# EAGLE board xilinx07 (EAGLE 3.55)
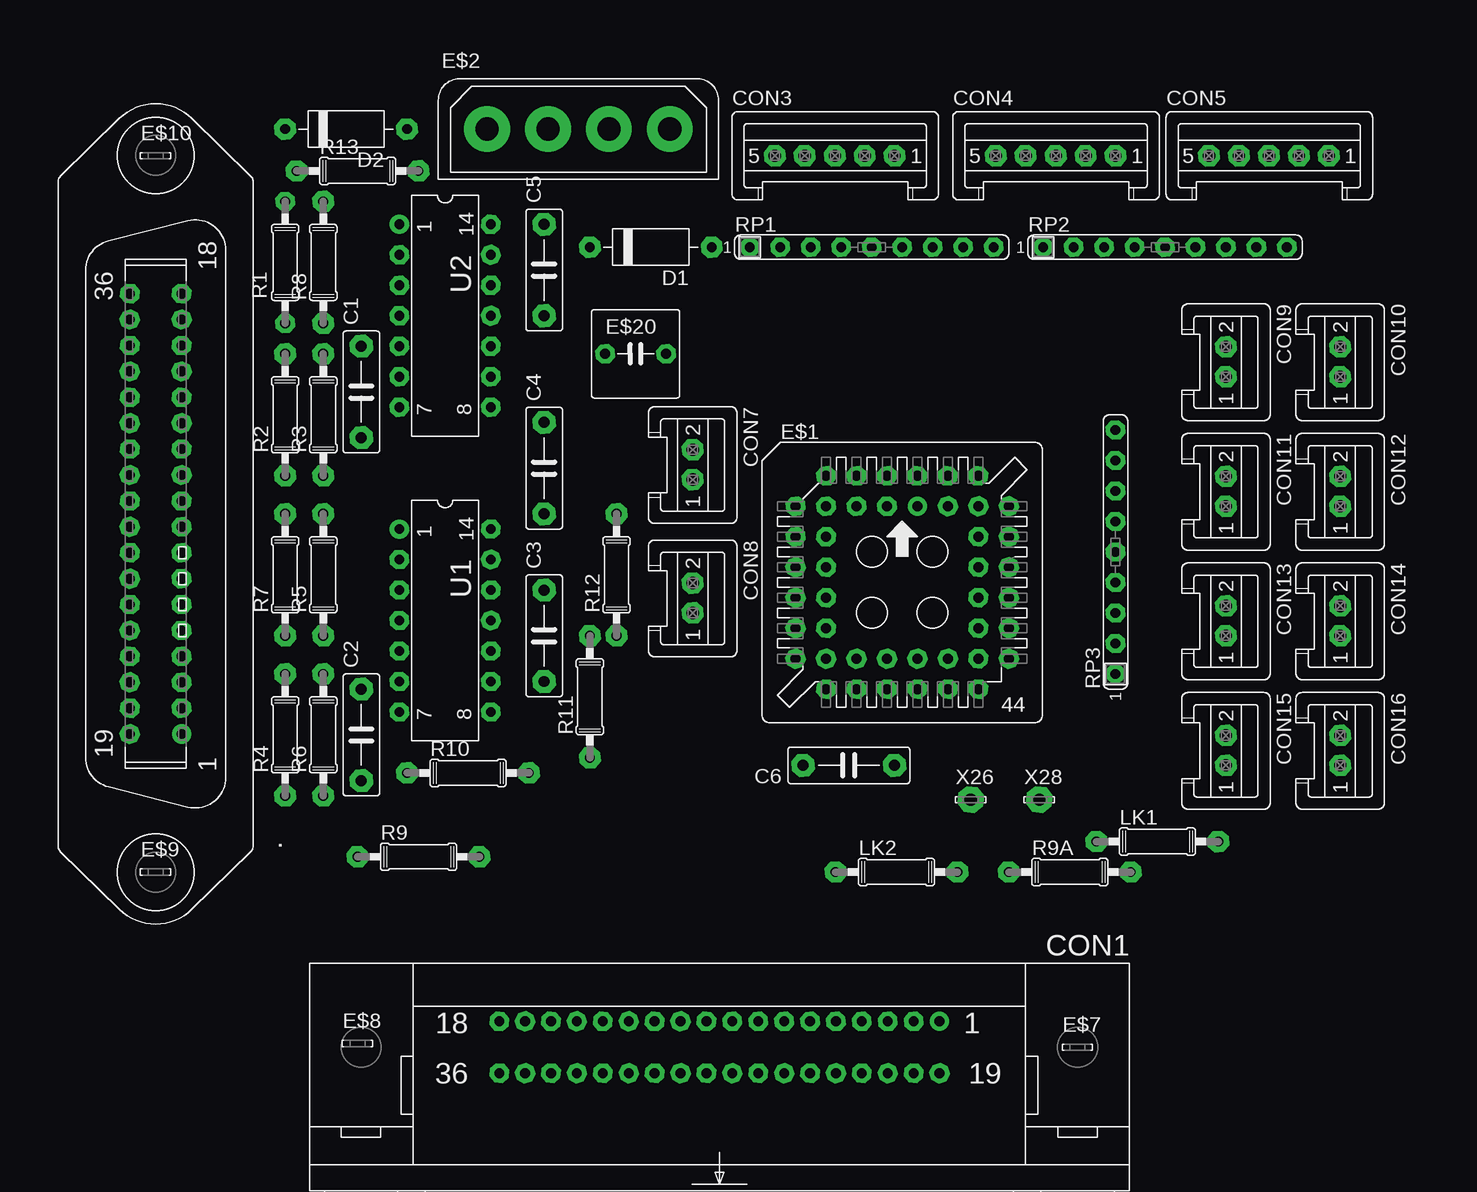
[diagram p0: board, top side]
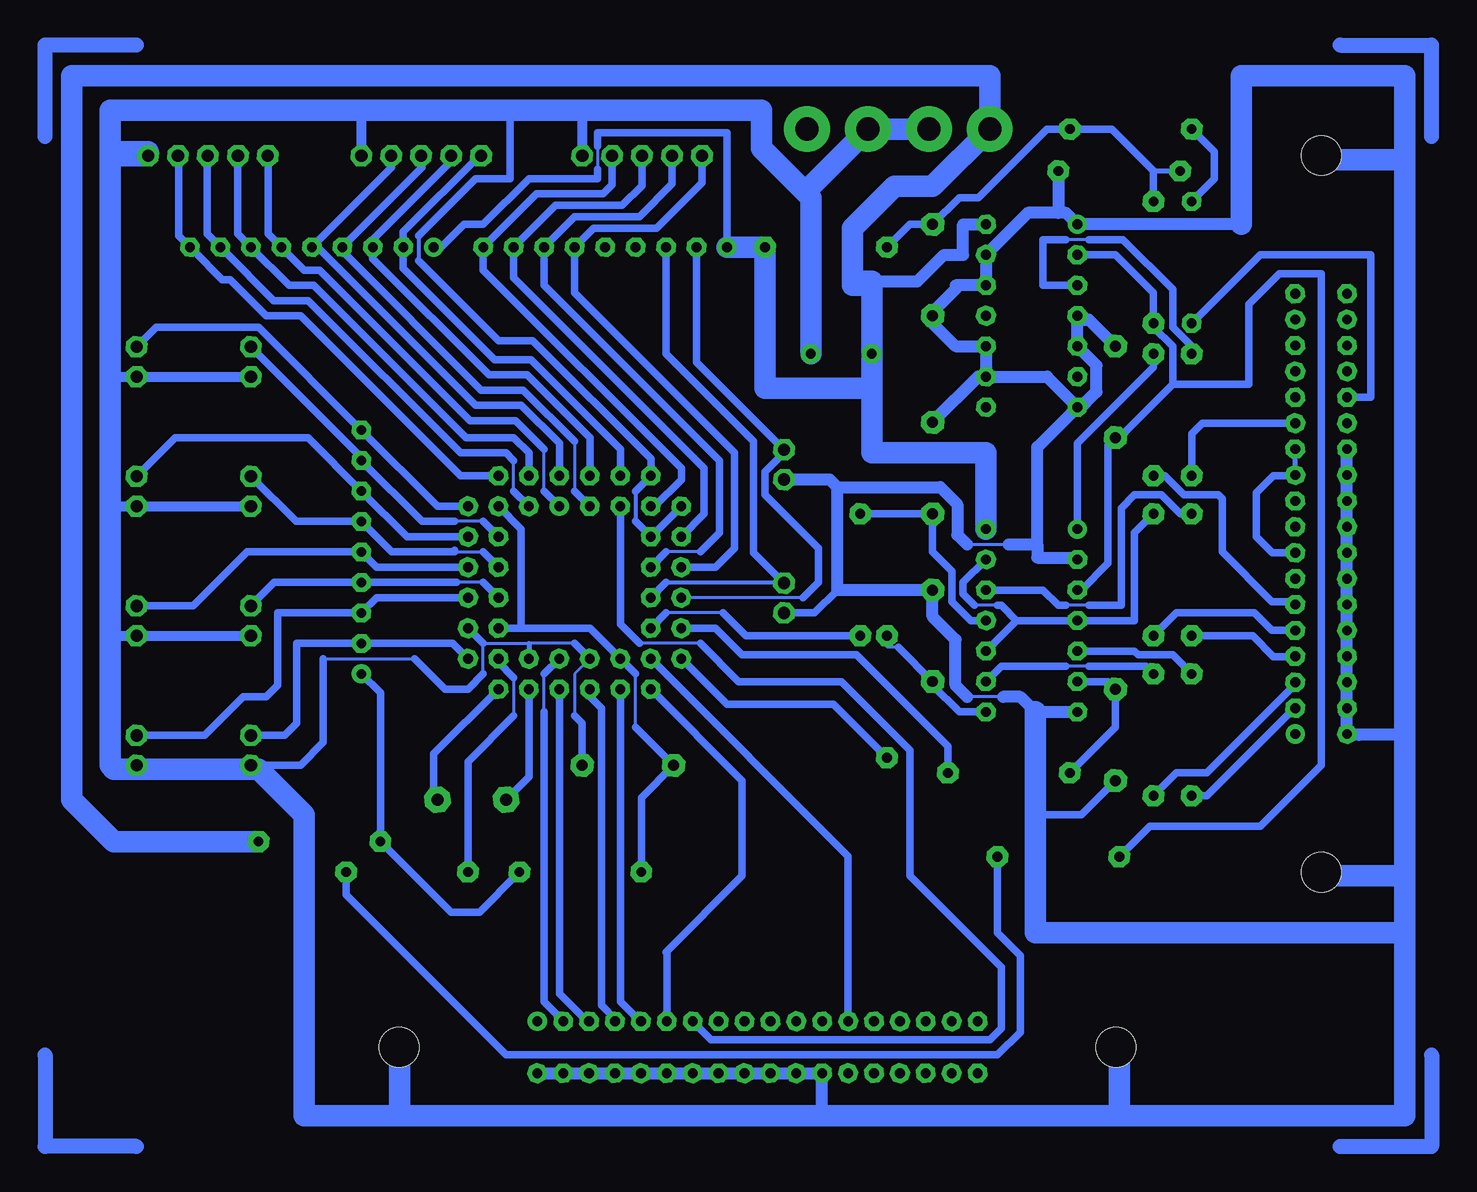
[diagram p1: board, bottom side, seen from below]

No outline drawn. Coordinates in mm, seen from the top.
Copper layers used: Bottom

## Footprints (pad centres in the part's own frame; a part is rotated, then mirrored left to right if it is on the bottom)
V = drill 0.813 pad 1.6 round:  -18.352,-2.159 | drill 0.813 pad 1.6 octagon:  -16.192,-2.159;  -14.034,-2.159;  -11.874,-2.159;  -9.716,-2.159;  -7.556,-2.159;  -5.397,-2.159;  -3.239,-2.159;  -1.079,-2.159;  1.079,-2.159;  3.239,-2.159;  5.397,-2.159;  -18.352,2.159;  -16.192,2.159;  -14.034,2.159;  -11.874,2.159;  -9.716,2.159;  -7.556,2.159;  -5.397,2.159;  -3.239,2.159;  -1.079,2.159;  1.079,2.159;  3.239,2.159;  5.397,2.159;  7.556,-2.159;  9.716,-2.159;  11.874,-2.159;  14.034,-2.159;  16.192,-2.159;  18.352,-2.159;  7.556,2.159;  9.716,2.159;  11.874,2.159;  14.034,2.159;  16.192,2.159;  18.352,2.159 | hole 3.302: -29.87,0; 29.87,0
,5B3 = drill 0.914 pad 1.905 octagon:  -3.81,0;  3.81,0
H = drill 0.813 pad 1.6 round:  -18.352,-2.159 | drill 0.813 pad 1.6 octagon:  -16.192,-2.159;  -14.034,-2.159;  -11.874,-2.159;  -9.716,-2.159;  -7.556,-2.159;  -5.397,-2.159;  -3.239,-2.159;  -1.079,-2.159;  1.079,-2.159;  3.239,-2.159;  5.397,-2.159;  -18.352,2.159;  -16.192,2.159;  -14.034,2.159;  -11.874,2.159;  -9.716,2.159;  -7.556,2.159;  -5.397,2.159;  -3.239,2.159;  -1.079,2.159;  1.079,2.159;  3.239,2.159;  5.397,2.159;  7.556,-2.159;  9.716,-2.159;  11.874,-2.159;  14.034,-2.159;  16.192,-2.159;  18.352,-2.159;  7.556,2.159;  9.716,2.159;  11.874,2.159;  14.034,2.159;  16.192,2.159;  18.352,2.159 | hole 3.302: -29.87,0; 29.87,0
5P = drill 1.016 pad 1.778 octagon:  -4.978,0;  -9.982,0;  -7.493,0;  -2.489,0;  0,0
2P = drill 1.016 pad 1.778 octagon:  -2.489,0;  0,0
10 = drill 0.813 pad 1.778 octagon:  -5.08,0;  5.08,0
4 = drill 0.813 pad 1.6 round:  1.27,6.35 | drill 0.813 pad 1.6 octagon:  -1.27,8.89;  -1.27,6.35;  -3.81,8.89;  -3.81,6.35;  -6.35,8.89;  -8.89,6.35;  -6.35,6.35;  -8.89,3.81;  -6.35,3.81;  -8.89,1.27;  -6.35,1.27;  -8.89,-1.27;  -6.35,-1.27;  -8.89,-3.81;  -6.35,-3.81;  -8.89,-6.35;  -6.35,-8.89;  -6.35,-6.35;  -3.81,-8.89;  -3.81,-6.35;  -1.27,-8.89;  -1.27,-6.35;  1.27,-8.89;  1.27,-6.35;  3.81,-8.89;  3.81,-6.35;  6.35,-8.89;  8.89,-6.35;  6.35,-6.35;  8.89,-3.81;  6.35,-3.81;  8.89,-1.27;  6.35,-1.27;  8.89,1.27;  6.35,1.27;  8.89,3.81;  6.35,3.81;  8.89,6.35;  6.35,8.89;  6.35,6.35;  3.81,8.89;  3.81,6.35;  1.27,8.89
OPPY-4 = drill 1.93 pad 3.81 round:  7.62,0;  2.54,0;  -2.54,0;  -7.62,0
P10 = drill 1.016 pad 2.159 octagon:  0,0
B7,2 = drill 0.813 pad 1.6 octagon:  -2.54,0;  2.54,0
07/10A = drill 0.813 pad 1.778 octagon:  -5.08,0;  5.08,0
07/10 = drill 0.813 pad 1.6 octagon:  -5.08,0;  5.08,0
L9 = drill 0.813 pad 1.6 round:  -10.16,0 | drill 0.813 pad 1.6 octagon:  -7.62,0;  -5.08,0;  -2.54,0;  0,0;  2.54,0;  5.08,0;  7.62,0;  10.16,0
L14 = drill 0.813 pad 1.6 round:  -7.62,-3.81 | drill 0.813 pad 1.6 octagon:  -5.08,-3.81;  -2.54,-3.81;  0,-3.81;  2.54,-3.81;  5.08,-3.81;  7.62,-3.81;  7.62,3.81;  5.08,3.81;  2.54,3.81;  0,3.81;  -2.54,3.81;  -5.08,3.81;  -7.62,3.81

## Placement (x,y rotation side)
.  [V]  2.54,48.9 90 top
C1  100pF  [,5B3]  19.68,59.05 90 top
C2  100pF  [,5B3]  19.68,30.48 90 top
C3  100pF  [,5B3]  34.92,38.73 90 top
C4  100pF  [,5B3]  34.92,52.7 90 top
C5  0.01uF  [,5B3]  34.92,69.22 90 top
C6  100pF  [,5B3]  60.33,27.94 180 top
CON1  Printer Port  [H]  49.53,4.45 180 top
CON3  X Stepper  [5P]  64.14,78.74 0 top
CON4  Y Stepper  [5P]  82.55,78.74 0 top
CON5  Z Stepper  [5P]  100.33,78.74 0 top
CON7  Spindle  [2P]  47.31,51.75 270 top
CON8  Coolant  [2P]  47.31,40.64 270 top
CON9  XS Limit  [2P]  91.76,60.33 270 top
CON10  XE  [2P]  101.28,60.33 270 top
CON11  YS Limit  [2P]  91.76,49.53 270 top
CON12  YE  [2P]  101.28,49.53 270 top
CON13  ZS Limit  [2P]  91.76,38.73 270 top
CON14  ZE  [2P]  101.28,38.73 270 top
CON15  Stop  [2P]  91.76,27.94 270 top
CON16  Door  [2P]  101.28,27.94 270 top
D1  1N4001  [10]  43.81,71.12 180 top
D2  1N4001  [10]  18.41,80.96 180 top
E$1  xilinx9536PC44  [4]  64.77,43.18 0 top
E$2  [OPPY-4]  37.78,80.96 0 top
E$3  [1]  -6.03,-3.17 0 top
E$4  [1]  108.27,-3.17 90 top
E$5  [1]  108.27,87.31 180 top
E$6  [1]  -6.03,87.31 270 top
E$7  [P10]  79.38,4.45 0 top
E$8  [P10]  19.37,4.76 0 top
E$9  [P10]  2.54,19.05 0 top
E$10  [P10]  2.54,78.74 0 top
E$20  22uF 16V  [B7,2]  42.55,62.23 0 top
LK1  0R  [07/10A]  86.04,21.59 0 top
LK2  0R  [07/10A]  64.29,19.05 0 top
R1  100R  [07/10]  13.34,69.85 90 top
R2  50R  [07/10A]  13.34,57.15 90 top
R3  300R  [07/10A]  16.51,57.15 90 top
R4  300R  [07/10A]  13.34,30.48 90 top
R5  300R  [07/10A]  16.51,43.81 90 top
R6  300R  [07/10A]  16.51,30.48 90 top
R7  300R  [07/10A]  13.34,43.81 90 top
R8  5K1  [07/10A]  16.51,69.85 90 top
R9  47R  [07/10A]  24.45,20.32 0 top
R9A  47R  [07/10A]  78.74,19.05 0 top
R10  100R  [07/10A]  28.57,27.3 0 top
R11  100R  [07/10A]  38.73,33.66 90 top
R12  100R  [07/10A]  40.96,43.81 90 top
R13  1K0  [07/10A]  19.37,77.47 0 top
RP1  1K  [L9]  62.23,71.12 0 top
RP2  1K  [L9]  86.68,71.12 0 top
RP3  1K  [L9]  82.55,45.72 90 top
U1  74HC125  [L14]  26.67,40.01 270 top
U2  74HC125  [L14]  26.67,65.41 270 top
X26  [P10]  70.48,25.08 0 top
X28  [P10]  76.2,25.08 0 top

## Library data of the parts
. CON1 = champ-c
C1-C6 E$20 = cap
CON3-CON5 CON7-CON16 = con-mt
D1 D2 = discrete
E$1 = plccpack
E$2 = amp-nlok
E$3-E$6 = marks
E$7-E$10 X26 X28 = solpad
LK1 LK2 R1-R9 R9A R10-R13 = r
RP1-RP3 = r-sil
U1 U2 = 74xx

## Nets
CON2: .. C1. C3. C4. C5. C6. CON1. CON3. CON4. CON5. CON7. CON8. CON9. CON10. CON11. CON12. CON13. CON14. CON15. CON16. E$1. E$2. E$20. R13. U1. U2.
S$1: CON1. E$1.
S$2: E$1. R10.
S$3: CON1. E$1.
S$4: CON1. E$1.
S$5: CON1. E$1.
S$6: CON1. E$1.
S$7: CON1. E$1.
S$8: E$1. R9A.
S$9: CON9. E$1. RP3.
S$10: CON3. E$1. RP1.
S$11: CON3. E$1. RP1.
S$12: CON3. E$1. RP1.
S$13: CON3. E$1. RP1.
S$14: CON4. E$1. RP2.
S$15: R7.
S$16: R5.
S$17: .. R4.
S$18: .. R6.
S$19: .. R2.
S$20: .. R1.
S$21: C2. R10. U1.
S$22: .. R3.
S$23: R7. U1.
S$24: R6. U1.
S$25: R5. U1.
S$26: R4. U1.
S$27: R2. U2.
S$28: R3. U1.
S$29: D2. R1.
S$30: C5. D1. D2. R8. R13.
S$31: C1. R8. R9. U1. U2.
S$32: C3. R11. U1.
S$33: C4. R12. U1.
S$34: D1. E$2. E$20. LK1. RP1. RP2. U1. U2.
S$35: R9. R9A.
S$36: E$1. R11.
S$37: E$1. R12.
S$38: CON4. E$1. RP2.
S$39: CON4. E$1. RP2.
S$40: CON4. E$1. RP2.
S$41: E$1.
S$42: CON5. E$1. RP2.
S$43: E$1. RP2.
S$44: CON5. E$1. RP2.
S$45: CON1. E$1.
S$46: CON8. E$1. RP1.
S$47: CON7. E$1. RP1.
S$48: CON10. E$1. RP3.
S$49: CON12. E$1. RP3.
S$50: ..
S$51: CON14. E$1. RP3.
S$52: CON13. E$1. RP3.
S$53: CON16. E$1. RP3.
S$54: CON15. E$1. RP3.
S$55: LK1. LK2. RP3.
S$56: C2.
S$60: E$1. X28.
S$61: E$1. X26.
S$62: C6. E$1. LK2.
S$63: CON11. E$1. RP3.
S$64: CON5. RP2.
S$65: ..
S$66: ..

## Tracks (layer width: path | path; a pad name or v marks a point on that pad's centre or on a via)
CON2
  Bottom 0.254: 64.77,32.07 64.77,35.56 63.5,36.83 | 22.86,57.78 22.86,57.47 | 30.48,60.33 31.11,60.33 | 72.39,35.56 72.39,38.1 68.58,38.1 64.77,38.1 | 32.07,46.35 28.57,46.35 | 35.24,65.09 35.24,65.41 34.92,65.41 32.7,67.63 30.8,67.63 30.48,67.94 | 85.72,36.83 78.11,36.83 | 33.02,67.94 33.02,67.63 | 29.05,33.66 32.07,33.66 | 26.35,13.97 26.67,13.65
  Bottom 0.317: 59.69,50.8 59.69,48.26 | 77.79,72.07 77.79,70.01
  Bottom 0.406: 68.58,38.1 68.58,36.83
  Bottom 0.61: 55.88,49.53 58.42,46.99 59.69,48.26 | 59.69,50.8 58.42,52.07 58.42,53.5 68.26,63.34 | 64.14,27.62 64.14,27.94 64.14,31.43 64.77,32.07 | 68.26,63.34 | 68.26,63.34 71.12,63.34 77.79,70.01 | 22.86,57.78 26.19,54.45 | 22.54,45.24 22.7,45.24 22.86,45.09 | 77.79,72.07 73.03,76.83 70.17,76.83 70.17,82.55 | 64.77,38.1 63.5,36.83 | 72.39,38.1 73.66,39.37 | 72.39,35.56 73.66,34.29 75.56,34.29 78.11,36.83 | CON8. 44.77,40.64 42.86,42.55 | 85.72,36.83 85.72,29.84 87.63,27.94 92.08,27.94 | R13. 24.45,74.61 22.86,73.03 | 52.77,2.29 52.7,2.29 52.7,2.22 | 50.61,2.29 50.64,2.29 50.64,2.22
  Bottom 0.813: 64.14,82.55 CON3. | 82.55,82.55 CON4. | CON9. CON10. 103.5,60.33 | CON11. CON12. 103.5,49.53 | CON15. 92.08,27.94 CON16. 103.5,27.94 | CON13. CON14. 103.5,38.73 | 50.48,2.22 50.8,2.22 | 50.48,2.22 | 50.48,2.22 50.61,2.22 50.61,2.29 | 48.42,2.22 48.45,2.22 48.45,2.29 | 46.29,2.22 46.29,2.29 | -0.64,30.48 0.38,30.48 | 44.13,2.22 44.13,2.29 | 44.13,-1.27 44.13,-0.64 | 67.88,2.22 67.88,2.29 | 65.72,2.22 65.72,2.29 | 63.56,2.22 63.56,2.29 | 61.4,2.22 61.4,2.29 | 59.24,2.22 59.24,2.29 | 57.09,2.29 57.09,2.22 57.15,2.22 | 54.93,2.29 54.93,2.22
  Bottom 1.016: C1. 21.91,65.09 22.86,65.09 | 22.86,65.09 22.86,65.41 | 22.86,65.09 22.86,62.87 21.27,61.28 21.27,59.05 22.86,57.47 | E$20. 45.09,76.2 | 0.38,54.29 0.38,52.13 0.38,52.07 | 22.7,45.24 26.19,45.24 26.19,46.35 | 26.19,54.45 22.86,57.78 25.4,60.33 30.48,60.33 30.48,62.87 33.02,62.87 35.24,65.09 | 26.19,54.45 | 0.38,52.07 0.64,52.07 | 0.64,50.16 0.38,50.16 0.38,49.97 | 31.11,60.33 C4. | 0.38,49.97 0.38,52.07 | 26.19,46.35 26.19,54.45 | 28.57,46.35 26.19,46.35 | 0.38,49.97 0.38,47.82 0.38,47.62 | 0.38,47.62 0.64,47.62 | 0.64,45.72 0.38,45.72 0.38,45.66 | 32.07,46.35 32.86,47.15 32.86,49.69 34.29,51.12 42.86,51.12 | 0.38,45.66 0.38,47.62 | 0.38,45.66 0.38,43.5 0.38,43.18 | CON7. 43.5,51.75 42.86,51.12 | 0.38,43.18 0.64,43.18 | 33.02,67.63 35.24,65.41 | 0.38,43.18 0.38,41.34 0.38,41.27 | 42.86,51.12 42.86,42.55 C3. 34.92,40.32 33.02,38.42 33.02,34.61 32.07,33.66 | 0.38,41.27 0.64,41.27 | 0.64,39.37 0.38,39.37 0.38,39.18 | 33.02,67.94 30.48,67.94 30.48,70.48 26.99,73.98 24.45,73.98 | 0.38,39.18 0.38,41.27 | 0.38,39.18 0.38,37.02 0.38,36.83 | R13. 24.45,73.98 | 0.38,36.83 0.64,36.83 | 0.64,34.92 0.38,34.92 0.38,34.86 | 0.38,34.86 0.38,36.83 | 24.45,73.98 23.81,73.98 22.86,73.03 9.21,73.03 | 0.38,34.86 0.38,32.7 0.38,32.38 | 0.38,32.38 0.64,32.38 | 50.61,2.22 48.45,2.22 46.29,2.22 44.13,2.22 44.13,-0.64 | 0.38,32.38 0.38,30.54 0.38,30.48 | 29.05,33.66 27.62,33.66 26.35,32.38 22.86,32.38 | 0.38,30.48 0.64,30.48 | -0.64,30.48 -4.45,30.48 0.38,30.48 | 67.88,2.22 65.72,2.22 63.56,2.22 61.4,2.22 59.24,2.22 57.09,2.22 54.93,2.22 | 54.93,2.29 52.77,2.29 50.64,2.29
  Bottom 1.778: 35.24,80.96 40.32,80.96 45.09,76.2 | E$20. 45.09,75.25 49.21,79.38 49.21,82.55 64.14,82.55 70.17,82.55 82.55,82.55 103.5,82.55 103.5,79.06 100.33,79.06 CON5. 103.5,78.74 103.5,60.33 103.5,49.53 103.5,38.73 103.5,27.94 103.19,27.62 91.12,27.62 87.31,23.81 87.31,-1.27 79.38,-1.27 | 9.21,73.03 9.21,85.41 -4.45,85.41 -4.45,30.48 -4.45,13.97 | 79.38,-1.27 79.38,4.45 | 26.35,32.38 26.35,13.97 -4.45,13.97 | 79.38,-1.27 44.13,-1.27 -4.45,-1.27 -4.45,13.97
S$1
  Bottom 0.61: 41.97,6.6 41.97,20.38 58.42,36.83
S$2
  Bottom 0.61: R10. 33.66,29.53 41.27,37.15 50.8,37.15 53.02,39.37 55.88,39.37
S$3
  Bottom 0.254: 57.09,12.32 57.15,12.38
  Bottom 0.61: 57.09,6.6 57.09,12.32 | 57.15,12.38 50.8,18.73 50.8,26.67 58.42,34.29
S$4
  Bottom 0.254: 59.24,6.6 59.31,6.6
  Bottom 0.61: 59.31,6.6 60.96,8.26 60.96,34.29
S$5
  Bottom 0.254: 61.4,6.6 61.4,6.79
  Bottom 0.61: 61.4,6.79 62.55,7.94 62.55,32.7 63.5,33.66 63.5,34.29
S$6
  Bottom 0.254: 63.56,6.6 63.75,6.6
  Bottom 0.61: 63.75,6.6 66.04,8.89 66.04,34.29
S$7
  Bottom 0.254: 65.72,6.6 65.72,6.67 | 67.31,32.38 67.31,35.56
  Bottom 0.61: 65.72,6.67 67.31,8.26 67.31,32.38 | 67.31,35.56 66.04,36.83
S$8
  Bottom 0.254: 71.12,36.83 71.12,36.51 | 69.85,35.24 69.85,32.07
  Bottom 0.61: 71.12,36.51 69.85,35.24 | 69.85,32.07 73.66,28.26 73.66,19.05
S$9
  Bottom 0.254: 72.39,48.26 74.77,48.26
  Bottom 0.61: 82.55,53.29 82.55,53.34 | 82.55,53.34 82.55,53.61 91.76,62.81 | 82.55,53.34 77.47,48.26 74.77,48.26 | 72.39,48.26 | 71.12,46.99 72.39,48.26
S$10
  Bottom 0.254: 56.2,44.45 55.88,44.45
  Bottom 0.61: 54.15,78.74 54.15,76.5 57.94,72.71 63.18,72.71 64.77,71.12 64.77,67.31 51.44,53.98 51.44,46.04 53.02,44.45 55.88,44.45
S$11
  Bottom 0.254: 54.29,45.72 57.15,45.72
  Bottom 0.61: 56.64,78.74 56.64,76.39 59.37,73.66 64.77,73.66 67.31,71.12 67.31,67.94 52.7,53.34 52.7,47.31 54.29,45.72 | 57.15,45.72 58.42,44.45
S$12
  Bottom 0.61: 59.16,78.74 59.16,76.26 60.8,74.61 66.36,74.61 69.85,71.12 69.85,68.58 53.98,52.7 53.98,48.9 55.88,46.99
S$13
  Bottom 0.254: 58.1,49.53 58.42,49.53
  Bottom 0.61: 61.65,78.74 61.65,76.31 62.39,75.56 67.94,75.56 RP1. 72.39,69.22 55.88,52.7 55.88,51.75 58.1,49.53
S$14
  Bottom 0.254: 72.71,78.74 72.57,78.74
  Bottom 0.61: 72.71,78.74 79.06,72.39 79.06,71.12 79.06,69.37 71.44,61.75 68.42,61.75 60.96,54.29 60.96,52.07
S$15
  Bottom 0.61: 13.34,38.73 8.26,38.73 6.51,36.99 4.45,36.99 | 4.45,36.99
S$16
  Bottom 0.61: 16.51,38.73 14.61,40.64 8.1,40.64 6.67,39.21 5.08,39.21
S$17
  Bottom 0.254: 4.45,33.02 4.7,32.77 4.7,32.7
  Bottom 0.61: 13.34,25.4 12.06,25.4 4.7,32.77
S$18
  Bottom 0.254: 4.45,34.92 4.51,34.86 4.7,34.86
  Bottom 0.61: 16.51,25.4 14.61,27.3 12.06,27.3 4.51,34.86
S$19
  Bottom 0.61: 4.7,56.45 12.45,56.45 13.34,55.56 13.34,52.07
S$20
  Bottom 0.61: 0.38,58.61 -1.59,58.61 -1.59,70.48 7.62,70.48 13.34,64.77
S$21
  Bottom 0.254: 23.81,26.99 23.5,27.3 23.18,27.62
  Bottom 0.61: 22.86,34.92 20.32,34.92 C2. 19.68,31.11 23.18,27.62
S$22
  Bottom 0.254: 4.45,41.27 4.51,41.34 4.7,41.34
  Bottom 0.61: 16.51,52.07 15.56,52.07 13.97,50.48 11.11,50.48 10.79,50.16 10.79,45.72 6.67,41.59 4.76,41.59 4.51,41.34
S$23
  Bottom 0.254: 21.91,41.27 23.81,41.27
  Bottom 0.61: R7. 14.29,48.9 15.88,50.48 18.1,50.48 19.21,49.37 19.21,41.27 21.91,41.27 | 23.81,41.27 24.45,41.27 25.72,42.55 30.48,42.55
S$24
  Bottom 0.254: 21.91,36.2 23.81,36.2 | 30.48,34.92 30.48,34.61
  Bottom 0.61: R6. 17.14,36.2 21.91,36.2 | 23.81,36.2 29.21,36.2 30.48,34.92
S$25
  Bottom 0.254: 23.18,39.69 22.86,40.01 | 29.53,41.27 31.43,41.27 | 30.48,45.09 30.16,45.09
  Bottom 0.61: R5. 18.1,47.31 18.1,40.01 22.86,40.01 27.94,40.01 | 30.48,37.47 27.94,40.01 | 27.94,40.01 29.21,41.27 29.53,41.27 | 31.43,41.27 32.38,42.23 32.38,43.18 30.48,45.09
S$26
  Bottom 0.61: R4. 14.92,37.15 17.78,37.15 18.1,37.47 22.86,37.47
S$27
  Bottom 0.254: 21.91,71.75 23.81,71.75 | 22.86,67.94 22.54,67.94
  Bottom 0.61: R2. 13.34,62.87 14.92,64.45 14.92,67.63 19.05,71.75 21.91,71.75 | 23.81,71.75 25.72,71.75 25.72,67.94 22.86,67.94
S$28
  Bottom 0.406: R3. 16.67,62.23 16.51,62.07
  Bottom 0.61: 22.86,47.62 22.86,54.77 16.51,61.12 16.51,62.07
S$29
  Bottom 0.61: R1. 11.43,76.83 11.43,79.06 D2.
S$30
  Bottom 0.406: 16.51,77.47 14.29,77.47 | 35.24,72.71 C5.
  Bottom 0.61: R8. 16.51,77.47 20,80.96 23.5,80.96 25.4,80.96 31.11,75.25 32.7,75.25 C5. 36.83,73.03 D1.
S$31
  Bottom 0.254: 22.86,70.48 23.18,70.48
  Bottom 0.406: 19.37,55.24 19.68,55.24 20,55.24 | 16.51,64.45 16.51,64.77
  Bottom 0.61: 22.86,42.55 22.54,42.55 20.32,44.77 20.32,54.61 19.68,55.24 | 22.86,70.48 19.68,70.48 16.51,67.31 16.51,64.77 | 14.92,59.69 19.37,55.24 | 19.37,20.32 16.83,22.86 7.62,22.86 2.54,27.94 2.54,68.9 6.03,68.9 8.57,66.36 8.57,59.69 14.92,59.69 | 14.92,59.69 14.92,62.87 16.51,64.45
S$32
  Bottom 0.254: 34.92,34.61 34.92,34.92 | R11. 38.73,37.78 37.78,37.78
  Bottom 0.61: 30.48,32.38 32.7,32.38 34.92,34.61 | 34.92,34.92 37.78,37.78
S$33
  Bottom 0.254: 34.92,48.58 34.92,48.9
  Bottom 0.61: 30.48,40.01 31.75,40.01 33.34,41.59 33.34,44.13 34.92,45.72 34.92,48.9 R12.
S$34
  Bottom 0.254: 62.87,79.69 62.87,77.63 | 62.87,80.64
  Bottom 0.61: 76.52,71.12 75.88,71.12 73.98,73.03 72.39,73.03 68.58,76.83 62.87,76.83 62.87,77.63 | 62.87,79.85 62.87,80.64 52.07,80.64 52.07,71.12 | 62.87,79.85 | 62.87,79.85 62.87,79.69 62.87,79.53
  Bottom 1.016: U2. 32.38,73.03 32.38,70.48 33.97,70.48 36.2,68.26 40.01,68.26
  Bottom 1.778: 52.07,71.12 48.9,71.12 48.9,59.37 40.01,59.37 | 40.01,67.94 40.01,62.23 40.01,61.91 | 40.01,67.94 40.01,68.26 41.59,68.26 41.59,72.71 | 40.01,59.37 40.01,61.91 | 40.01,59.37 40.01,53.98 30.48,53.98 U1. | LK1. 103.19,21.59 106.68,25.08 106.68,85.41 30.16,85.41 E$2. 34.92,76.2 38.1,76.2 41.59,72.71 | 41.59,72.71 41.59,67.94 40.01,67.94 | 40.01,67.94 40.01,61.91
S$35
  Bottom 0.61: R9. 29.53,13.97 27.62,12.06 27.62,5.71 29.53,3.81 70.48,3.81 83.82,17.14 R9A.
S$36
  Bottom 0.61: 38.73,28.57 43.18,33.02 52.07,33.02 55.88,36.83
S$37
  Bottom 0.254: 52.39,40.64 57.15,40.64
  Bottom 0.61: 40.96,38.73 50.48,38.73 52.39,40.64 | 57.15,40.64 58.42,39.37
S$38
  Bottom 0.254: 75.06,78.74 74.93,78.74 74.93,78.42
  Bottom 0.61: 74.93,78.42 81.92,71.44 81.6,71.12 81.6,70.17 71.91,60.48 68.74,60.48 63.5,55.24 63.5,52.07
S$39
  Bottom 0.254: 77.47,78.74 77.57,78.74 | 64.77,54.93 64.77,50.8
  Bottom 0.61: 77.47,78.74 77.47,77.79 84.14,71.12 84.14,70.8 72.55,59.21 69.06,59.21 64.77,54.93 | 64.77,50.8 63.5,49.53
S$40
  Bottom 0.254: 80.01,78.74 80.06,78.74
  Bottom 0.61: 80.01,78.74 80.01,77.79 86.68,71.12 86.2,71.12 73.03,57.94 69.22,57.94 66.04,54.77 E$1.
S$41
  Bottom 0.254: 67.31,50.8 67.31,54.29
  Bottom 0.61: 89.22,71.12 87.31,69.22 86.04,69.22 73.5,56.67 69.69,56.67 67.31,54.29 | 66.04,49.53 67.31,50.8
S$42
  Bottom 0.254: 92.87,78.74 92.84,78.74
  Bottom 0.61: 92.87,72.23 91.76,71.12 88.58,67.94 86.52,67.94 73.82,55.24 69.85,55.24 68.58,53.98 68.58,52.07 | 92.87,72.23 | 92.87,72.23 92.87,78.74
S$43
  Bottom 0.254: 94.3,71.12 93.98,71.12 93.98,70.8 | 69.85,50.8 69.85,53.34
  Bottom 0.61: 95.41,78.64 95.41,72.23 94.3,71.12 | 93.98,70.8 89.85,66.67 87,66.67 74.3,53.98 70.48,53.98 69.85,53.34 | 68.58,49.53 69.85,50.8
S$44
  Bottom 0.254: 97.79,78.74 97.84,78.74 | RP2. 96.52,71.12 96.52,70.8
  Bottom 0.61: RP2. 97.79,72.07 97.79,78.74 | 71.12,52.07 74.3,52.07 87.63,65.41 90.49,65.41 93.5,68.42 94.14,68.42 96.52,70.8
S$45
  Bottom 0.254: 54.29,38.1 59.37,38.1
  Bottom 0.61: 54.93,6.6 53.4,5.08 30.16,5.08 29.21,6.03 29.21,11.11 36.83,18.73 36.83,29.21 42.55,34.92 51.12,34.92 54.29,38.1 | 59.37,38.1 60.96,39.69 60.96,49.53
S$46
  Bottom 0.317: 47.31,43.18 47.31,43.13 | 57.15,43.18 47.31,43.18 | 46.99,43.18 47.31,43.18
  Bottom 0.61: 58.42,41.91 57.15,43.18 | 47.31,43.13 49.85,45.67 49.85,54.93 57.15,62.23 57.15,71.12
S$47
  Bottom 0.254: 45.72,41.91 55.88,41.91
  Bottom 0.317: 47.31,54.24 47.31,53.98
  Bottom 0.61: 45.72,41.91 44.45,43.18 44.45,46.04 48.9,50.48 48.9,52.39 47.31,53.98 | 47.31,54.24 54.61,61.54 54.61,71.12
S$48
  Bottom 0.254: RP3. 82.87,56.2
  Bottom 0.61: 101.28,62.81 99.64,64.45 91.12,64.45 RP3. | RP3. | RP3. 76.2,49.53 73.66,49.53
S$49
  Bottom 0.61: 101.28,52.02 98.06,55.24 87,55.24 82.55,50.8 78.74,46.99 73.66,46.99
S$50
  Bottom 0.406: 4.6,52.07 4.67,52.13 4.7,52.13 4.7,54.04 4.6,54.13 4.7,54.23 4.7,54.29
  Bottom 0.61: 4.7,45.66 6.6,45.66 7.94,46.99 7.94,50.64 6.51,52.07 4.6,52.07
S$51
  Bottom 0.61: 101.28,41.22 96.57,41.22 92.08,45.72 82.55,45.72 81.28,44.45 73.66,44.45
S$52
  Bottom 0.254: 72.39,43.18 74.61,43.18
  Bottom 0.61: 91.76,41.22 89.8,43.18 82.55,43.18 | 82.6,43.13 82.55,43.18 | 71.12,41.91 72.39,43.18 | 74.61,43.18 82.55,43.18
S$53
  Bottom 0.61: 101.28,30.43 95.62,30.43 92.39,33.66 90.49,33.66 89.53,34.61 89.53,40.64 82.55,40.64 81.28,41.91 73.66,41.91
S$54
  Bottom 0.61: 91.76,30.43 88.95,30.43 87.95,31.43 87.95,38.1 82.55,38.1 74.93,38.1 73.66,36.83
S$55
  Bottom 0.61: 82.55,35.56 80.96,33.97 80.96,21.59 75.09,15.72 72.71,15.72 69.53,18.89 69.37,18.89 LK2.
S$56
  Bottom 0.61: 19.68,26.67 22.54,23.81 26.35,23.81
S$57
  Bottom 1.778: 19.37,4.45 19.37,-0.95
S$58
  Bottom 1.778: 2.22,18.73 -4.13,18.73
S$59
  Bottom 1.778: 1.91,78.42 -4.13,78.42
S$60
  Bottom 0.305: 76.52,25.08 X28.
  Bottom 0.61: 71.12,34.29 76.52,28.89 76.52,25.08
S$61
  Bottom 0.61: 68.58,34.29 68.58,26.99 X26.
S$62
  Bottom 0.254: 59.69,31.11 59.69,35.56
  Bottom 0.61: 71.12,49.53 69.22,47.62 69.22,39.37 | 69.22,39.37 71.12,39.37 | 69.22,39.37 63.5,39.37 60.96,36.83 59.69,35.56 | 59.69,31.11 C6. 59.21,25.24 59.21,19.05
S$63
  Bottom 0.254: 82.55,48.26 82.23,48.26 82.23,47.94 | 74.77,45.72 72.39,45.72 | 72.39,45.72
  Bottom 0.61: 91.76,52.02 88,48.26 82.55,48.26 80.01,45.72 74.77,45.72 | 74.77,45.72 | 74.77,45.88 74.77,45.72 | 72.39,45.72 71.12,44.45
S$64
  Bottom 0.254: 90.33,78.74 90.35,78.74
  Bottom 0.61: 90.33,78.74 90.33,72.23 89.22,71.12
S$65
  Bottom 0.254: 4.7,39.18 4.89,39.18
S$66
  Bottom 0.254: 4.7,37.02 4.64,37.02

## Text on the board
tValues: +